# EAGLE board fen (EAGLE 8.3.2)
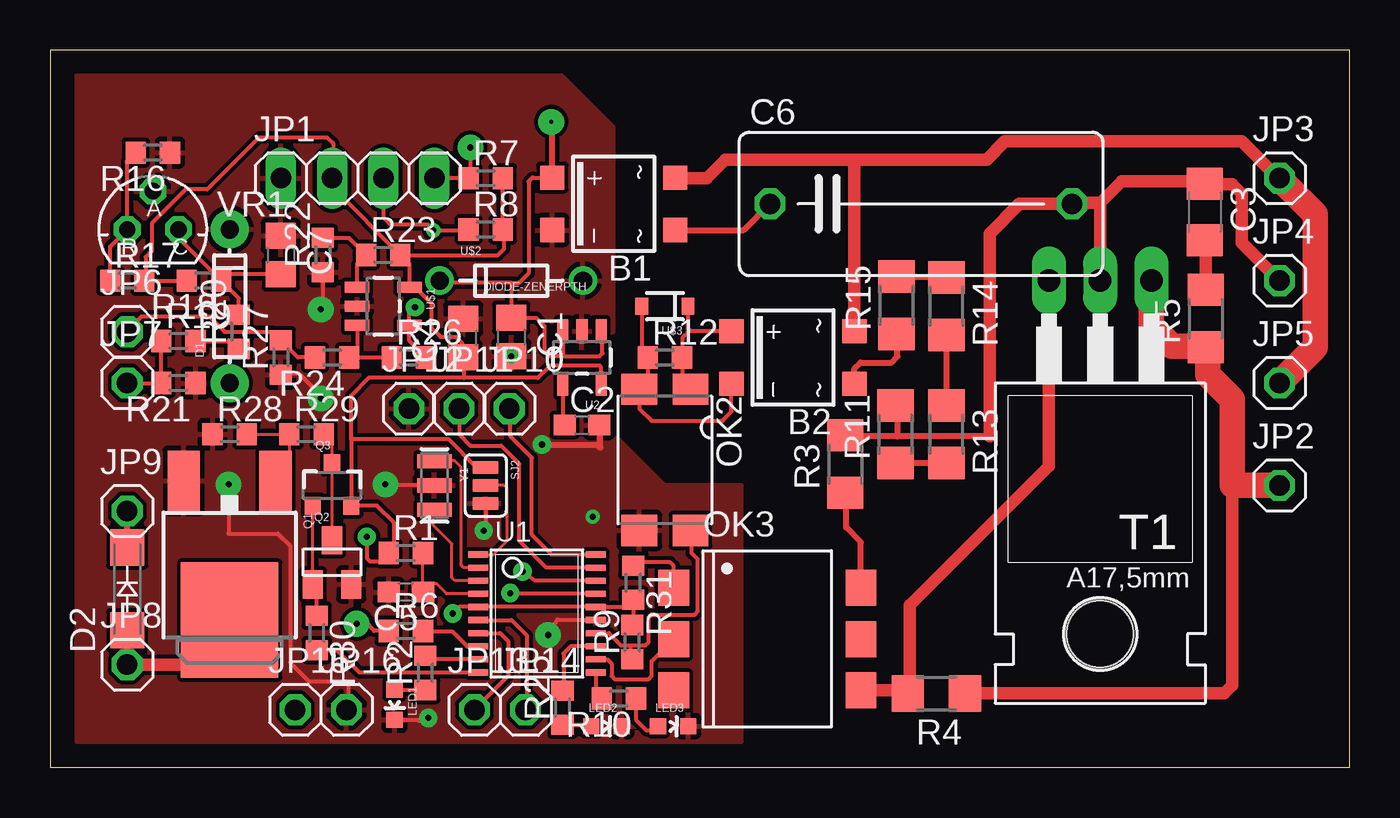
[diagram p0: board, top side]
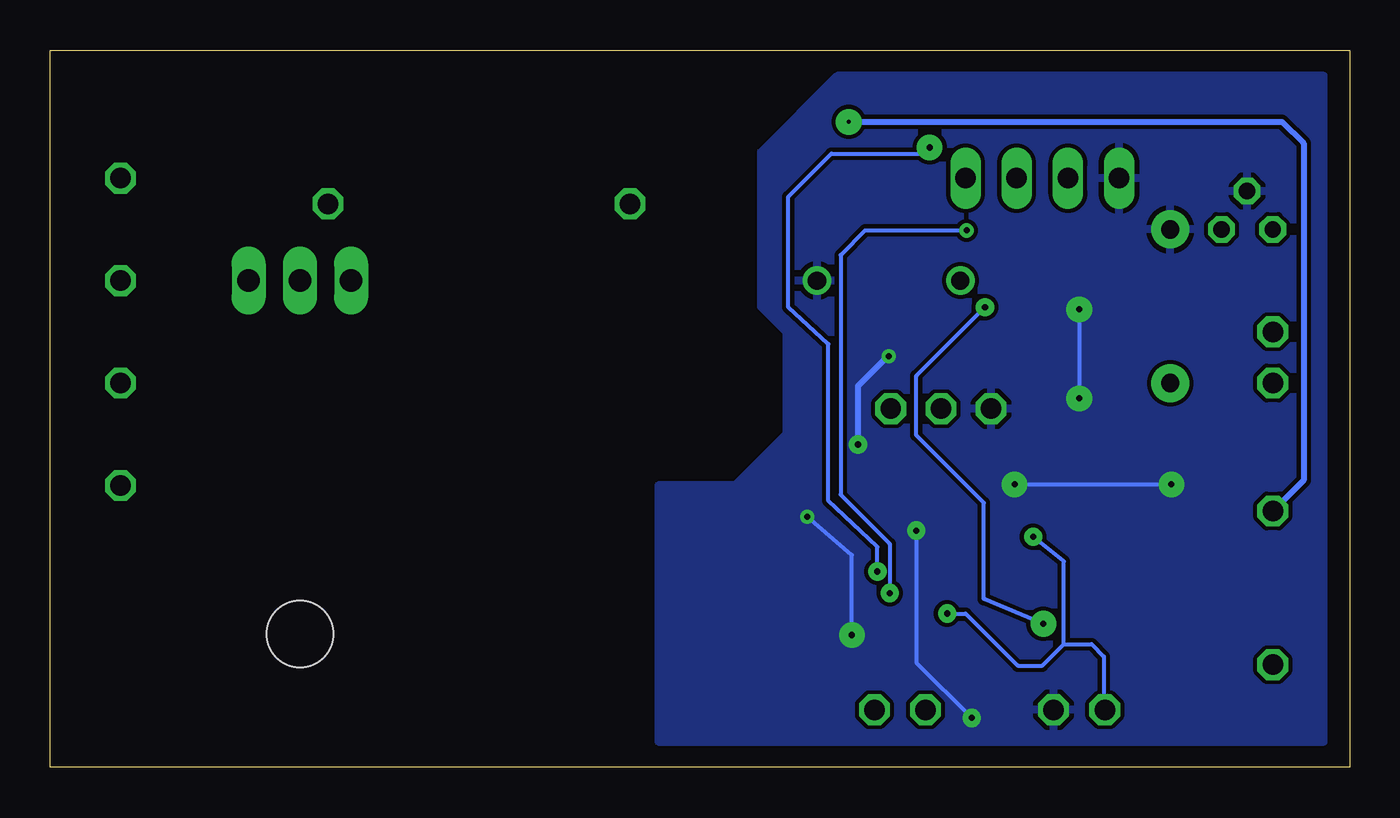
[diagram p1: board, bottom side, seen from below]

Size 64.44 x 35.55 mm. Coordinates in mm from the lower left corner, seen from the top.
Outline: 0,0 64.44,0 64.44,35.55 0,35.55 0,0
Copper layers (1*16): Top 0.035mm / dielectric 1.5mm / Bottom 0.035mm
Design rules "default": minimum track width 10mil, minimum drill 24mil, track to track 8mil, track to pad 8mil, pad to pad 8mil, via to via 8mil, smd to smd 8mil, copper to edge 40mil, drill to drill 8mil, minimum pad ring 10mil, minimum via ring 8mil, stop-mask expansion 4mil, vias tented up to drill 0mil, thermal gap 10mil

## Footprints (pad centres in the part's own frame; a part is rotated, then mirrored left to right if it is on the bottom)
SOIC-4 = smd 1.2 x 1.2: + 1.3,3.05; - -1.3,3.05; ~1 -1.3,-3.05; ~2 1.3,-3.05
C0805 = smd 1.3 x 1.5: 1 -0.95,0; 2 0.95,0
C0603 = smd 1.1 x 1: 1 -0.85,0; 2 0.85,0
C1206 = smd 1.6 x 1.8: 1 -1.4,0; 2 1.4,0
C150-072X183 = drill 1.016 octagon: 1 -7.493,0; 2 7.493,0
DIODE-1N4148 = drill 0.9 pad 1.88: A -3.81,0; C 3.81,0
SMA-DO214AC = smd 1.8 x 1.7: A -2.05,0; K 2.05,0
1X04 = drill 1.016 long: 1 -3.81,0; 2 -1.27,0; 3 1.27,0; 4 3.81,0
1X01 = drill 1.016 octagon: 1 0,0
LED-0603 = smd 0.8 x 0.8: A 0,-0.75; C 0,0.75
SMD4 = smd 1.78 x 1.55: 1 -1.27,-3.5; 2 1.27,-3.5; 3 1.27,3.5; 4 -1.27,3.5
DIL6-SMD = smd 1.78 x 1.52: 1 -2.54,-4.645; 2 0,-4.645; 3 2.54,-4.645; 4 2.54,4.645; 5 0,4.645; 6 -2.54,4.645
DPAK = smd 1.6 x 3: 1 -2.28,-5.31; 3 2.28,-5.31 | smd 4.826 x 5.715: 4 0,1.588
SOT23 = smd 1 x 1.4: 1 -0.95,-1.1; 2 0.95,-1.1; 3 0,1.1
SOT23-3 = smd 0.8 x 0.9: 1 -0.95,-1; 2 0.95,-1; 3 0,1.1
R0603 = smd 1 x 1.1: 1 -0.85,0; 2 0.85,0
R1206 = smd 1.6 x 1.803: 1 -1.422,0; 2 1.422,0
SJ_3 = smd 0.635 x 1.27: 1 -0.889,0; 2 0,0; 3 0.889,0
TO220BH = drill 1.118 long: G 2.54,-6.35; T1 -2.54,-6.35; T2 0,-6.35 | hole 3.302: 0,11.176
TSSOP20 = smd 0.305 x 0.991: 1 -2.925,-2.918; 2 -2.275,-2.918; 3 -1.625,-2.918; 4 -0.975,-2.918; 5 -0.325,-2.918; 6 0.325,-2.918; 7 0.975,-2.918; 8 1.625,-2.918; 9 2.275,-2.918; 10 2.925,-2.918; 11 2.925,2.918; 12 2.275,2.918; 13 1.625,2.918; 14 0.975,2.918; 15 0.325,2.918; 16 -0.325,2.918; 17 -0.975,2.918; 18 -1.625,2.918; 19 -2.275,2.918; 20 -2.925,2.918
SOT23-5 = smd 0.55 x 1.2: 1 -0.95,-1.3; 2 0,-1.3; 3 0.95,-1.3; 4 0.95,1.3; 5 -0.95,1.3
DIODE-ZENER = drill 0.9: P$1 -3.556,0; P$2 3.556,0
SOD-323 = smd 0.63 x 0.83: 1 -1.15,0; 2 1.15,0
TO92-CLP = drill 0.813 octagon: A 0,1.905; C 1.27,0; R -1.27,0
RESONATOR-SMD = smd 0.7 x 1.7: 1 -1.2,0; 2 0,0; 3 1.2,0

## Placement (x,y rotation side)
B1  MB8S  [SOIC-4]  27.94,27.94 90 top
B2  MB8S  [SOIC-4]  36.83,20.32 90 top
C1  [C0805]  22.86,21.34 270 top
C2  [C0603]  26.37,16.97 0 top
C3  [C1206]  57.25,27.53 270 top
C4  [C0805]  20.47,21.29 90 top
C5  [C0603]  17.63,8.69 180 top
C6  [C150-072X183]  43.18,27.94 0 top
C7  [C0805]  11.43,25.4 270 top
D1  [DIODE-1N4148]  8.89,22.86 90 top
D2  GF1  [SMA-DO214AC]  3.81,8.84 90 top
JP1  [1X04]  15.24,29.21 0 top
JP2  [1X01]  60.96,13.97 0 top
JP3  [1X01]  60.96,29.21 0 top
JP4  [1X01]  60.96,24.13 0 top
JP5  [1X01]  60.96,19.05 0 top
JP6  [1X01]  3.81,21.59 0 top
JP7  [1X01]  3.81,19.05 0 top
JP8  [1X01]  3.81,5.08 0 top
JP9  [1X01]  3.81,12.7 0 top
JP10  [1X01]  22.76,17.78 0 top
JP11  [1X01]  20.27,17.78 0 top
JP12  [1X01]  17.78,17.78 0 top
JP13  [1X01]  21.03,2.84 0 top
JP14  [1X01]  23.57,2.84 0 top
JP15  [1X01]  12.14,2.84 0 top
JP16  [1X01]  14.68,2.84 0 top
LED1  [LED-0603]  17.07,3.1 180 top
LED2  [LED-0603]  27.58,2.03 270 top
LED3  [LED-0603]  30.89,2.03 270 top
OK2  LTV816S  [SMD4]  30.48,15.24 180 top
OK3  MOC3042S  [DIL6-SMD]  35.56,6.35 270 top
Q1  MOSFET-NCHANNELFDD8780  [DPAK]  8.89,8.89 180 top
Q2  [SOT23]  13.97,10.16 0 top
Q3  TRANSISTOR_PNPSMD  [SOT23-3]  13.97,13.97 0 top
R1  [R0603]  17.63,10.62 0 top
R2  [R0603]  18.59,4.67 90 top
R3  [R1206]  39.42,15.04 90 top
R4  [R1206]  43.94,3.66 180 top
R5  [R1206]  57.3,22.25 90 top
R6  [R0603]  17.63,6.76 0 top
R7  [R0603]  21.59,29.21 0 top
R8  [R0603]  21.59,26.67 0 top
R9  [R0603]  28.85,6.2 90 top
R10  [R0603]  28.19,3.4 180 top
R11  [R1206]  41.91,16.51 90 top
R12  [R0603]  30.48,20.32 0 top
R13  [R1206]  44.45,16.51 270 top
R14  [R1206]  44.45,22.86 270 top
R15  [R1206]  41.96,22.91 90 top
R16  [R0603]  5.08,30.48 180 top
R17  [R0603]  3.81,24.13 0 top
R18  [R0603]  7.62,24.13 180 top
R19  [R0603]  6.35,21.13 0 top
R20  [R0603]  9.35,21.59 90 top
R21  [R0603]  6.35,19.05 180 top
R22  [R0603]  13.51,25.4 90 top
R23  [R0603]  16.51,25.4 0 top
R24  [R0603]  13.97,20.32 180 top
R25  [R0603]  25.4,2.95 90 top
R26  [R0603]  17.78,20.32 0 top
R27  [R0603]  11.43,20.32 90 top
R28  [R0603]  8.89,16.51 0 top
R29  [R0603]  12.7,16.51 0 top
R30  [R0603]  13.21,6.65 270 top
R31  [R0603]  28.91,9.14 270 top
SJ2  [SJ_3]  21.59,13.97 270 top
T1  BT138-H  [TO220BH]  52.07,17.78 180 top
U1  STM32F042FX  [TSSOP20]  24.13,7.62 270 top
U2  [SOT23-5]  26.37,20.32 180 top
U$1  LMV321M5  [SOT23-5]  16.51,22.86 270 top
U$2  DIODE-ZENERPTH  [DIODE-ZENER]  22.86,24.13 0 top
U$3  DIODE-ZENER-BZT52  [SOD-323]  30.48,22.86 180 top
VR1  [TO92-CLP]  5.08,26.67 0 top
Y1  8MHZ  [RESONATOR-SMD]  19.05,13.97 270 top

## Library data of the parts
B1 B2 = rectifier
C1-C7 R1-R31 = rcl
D1 Q2 Q3 U$2 U$3 = SparkFun-DiscreteSemi
D2 = diode
JP1-JP16 = pinhead
LED1-LED3 = SparkFun-LED
OK2 = optocoupler; OC_FARNELL: unknown; OC_NEWARK: unknown
OK3 = optocoupler; MF: FAIRCHILD SEMICONDUCTOR; MPN: MOC3042SM; OC_FARNELL: unknown; OC_NEWARK: 34C1339
Q1 = SparkFun-DiscreteSemi; PROD_ID: TRANS-09984
SJ2 = SparkFun-Passives
T1 = triac
U1 = STM32F042Fx
U2 = SparkFun-PowerIC; PROD_ID: VREG-00822
U$1 = SparkFun-AnalogIC
VR1 = v-reg
Y1 = SparkFun-FreqCtrl; PROD_ID: XTAL-08895

## Nets
ADC0: JP14.1 U1.6
ADC1: JP13.1 U1.7
ADC2: R6.2 U1.8
BOOT0: SJ2.2 U1.1
FAN-PWM: R30.2 U1.10
GND: B1.- C1.2 C2.2 C4.2 C5.2 C7.1 D1.C JP1.1 JP12.1 JP16.1 LED1.C LED2.C LED3.C OK2.3 Q1.3 Q2.2 R16.1 R21.1 R22.1 R27.1 R28.1 SJ2.3 U1.15 U2.2 U$1.2 U$2.P$2 VR1.A Y1.2
HEAT-PWM: OK3.2 U1.12
L: C3.1 C6.2 JP4.1 R3.2 R11.2 T1.T2
LED-M: R10.2 U1.11
LED-P: R2.2 U1.9
LED-RUN: R25.2 U1.13
N: B1.~2 B2.~2 JP3.1 JP5.1
N$1: LED2.A R25.1
N$2: OK3.4 R4.2 T1.G
N$3: OK3.6 R3.1
N$4: C3.2 R5.2
N$5: JP2.1 R4.1 R5.1 T1.T1
N$6: R6.1 R26.2 U$1.4
N$7: C2.1 U2.4
N$8: B2.- OK2.2 R12.1 U$3.2
N$10: B1.~1 C6.1
N$11: R11.1 R13.2
N$12: R14.1 R15.2
N$13: R13.1 R14.2
N$14: OK3.1 R31.1
N$15: B2.+ OK2.1 R12.2 U$3.1
N$16: R16.2 R17.1 VR1.R
N$17: D2.A JP8.1 Q1.4
N$18: C7.2 R18.1 R20.2 VR1.C
N$19: R22.2 R23.1 U$1.1
N$20: R24.1 R26.1 U$1.3
N$21: JP6.1 R24.2 R27.2
N$22: JP7.1 R19.1 R21.2
N$23: D1.A R19.2 R20.1
N$24: Q1.1 R28.2 R29.1
N$25: Q2.3 Q3.3 R29.2
N$26: Q2.1 Q3.1 R30.1
N$27: B2.~1 R15.1
N$28: LED3.A R10.1
N$29: LED1.A R2.1
NRST: C5.1 R1.2 U1.4
OSC-IN: U1.2 Y1.1
OSC-OUT: U1.3 Y1.3
SCL: JP1.3 R8.1 U1.17
SDA: JP1.4 R7.1 U1.18
SWCLK: JP10.1 U1.20
SWIO: JP11.1 U1.19
VCC: C4.1 JP1.2 JP15.1 Q3.2 R1.1 R7.2 R8.2 R9.2 R17.2 R18.2 R23.2 R31.2 SJ2.1 U1.5 U1.16 U2.5 U$1.5
VCC-IN: B1.+ C1.1 D2.K JP9.1 U2.1 U2.3 U$2.P$1
ZERO-DETECT: OK2.4 R9.1 U1.14

## Tracks (layer width: path | path; a pad name or v marks a point on that pad's centre or on a via)
ADC0
  Top 0.203: U1.6 22.88,7.29 23.62,6.55 23.62,2.9 JP14.1
ADC1
  Top 0.203: U1.7 22.31,6.64 22.71,6.25 22.71,4.52 JP13.1
ADC2
  Top 0.203: U1.8 20.68,6 19.96,6.71 18.53,6.71 R6.2
BOOT0
  Top 0.152: U1.1 21.98,10.54 22.66,11.23 22.66,13.82 22.5,13.97 SJ2.2
FAN-PWM
  Top 0.203: U1.10 15.32,4.7 14.21,5.8 R30.2
GND  (via drill 0.3, 0.3 pad 0.9, 0.3 pad 1.27)
  Top 0.203: U1.15 25.17,7.29 25.15,7.32 v24.69,6.55 | SJ2.3 21.59,11.84 v21.49,11.73 | v18.75,2.44 18.44,2.44 18.29,2.29 18.23,2.35 LED1.C | Y1.2 16.66,13.97 v16.61,14.02 | v8.84,14.02 8.84,11.58 11.28,11.58 11.89,10.97 11.89,5.18 12.8,4.27 14.63,4.27 14.78,4.12 14.78,2.95 JP16.1 | R22.1 13.51,22.81 v13.41,22.71 | v13.41,18.29 13.41,18.44 12.34,19.51 11.47,19.51 R27.1
  Top 0.305: 22.86,19.81 C1.2 | v24.38,16 27.13,16 27.28,15.85 27.28,16.9 C2.2
  Bottom 0.203: v24.69,6.55 24.69,10.52 v26.9,12.42 26.98,12.5 | v21.49,11.73 21.49,5.18 v18.75,2.44 | v16.61,14.02 v8.84,14.02 | v13.41,22.71 v13.41,18.29
  Bottom 0.305: C1.2 22.9,20.39 24.38,18.9 v24.38,16
  other vias: 22.86,20.39
  pour Top: 1.27,1.27 34.29,1.27 34.29,13.97 30.48,13.97 26.67,17.78 26.67,20.32 27.94,21.59 27.94,31.75 25.4,34.29 1.27,34.29
  pour Bottom: 1.27,34.29 25.4,34.29 29.21,30.48 29.21,22.86 27.94,21.59 27.94,16.51 30.48,13.97 34.29,13.97 34.29,1.27 1.27,1.27
HEAT-PWM
  Top 0.203: U1.12 27.62,5.34 27.84,5.13 27.84,4.52 27.99,4.37 29.67,4.37 29.82,4.52 29.82,5.25 OK3.2
L
  Top 0.305: R11.2 42.01,17.83 42.01,16.41 | 46.58,16.41 42.01,16.41 | R3.2 39.47,16.41 42.01,16.41
  Top 0.61: 46.58,16.41 46.58,26.47 48.06,27.94 C6.2 50.72,27.99 52.07,27.99 | T1.T2 52.07,27.99 | JP4.1 59.08,26.01 59.08,28.45 58.62,28.91 57.28,28.91 C3.1 57.13,29.06 53.14,29.06 52.07,27.99
LED-M
  Top 0.203: U1.11 27.05,3.55 R10.2
LED-P
  Top 0.203: U1.9 18.77,5.34 R2.2
LED-RUN
  Top 0.203: U1.13 25.81,6 25.45,5.64 25.45,3.85 R25.2
N
  Top 0.305: B2.~2
  Top 0.61: JP3.1 60.91,29.21 59.08,31.04 47.35,31.04 46.43,30.12 40.03,30.12 | 40.03,30.12 33.48,30.12 32.56,29.21 31.02,29.21 B1.~2 | B2.~2 39.88,29.97 40.03,30.12
  Top 1.27: JP5.1 62.74,20.83 62.74,27.43 JP3.1
N$1
  Top 0.203: R25.1 26.62,2.1 LED2.A
N$2
  Top 0.61: T1.G 49.53,14.94 42.62,8.03 42.62,3.76 R4.2 42.37,3.81 OK3.4
N$3
  Top 0.305: 40.15,8.94 OK3.6 40.2,11.15 39.47,11.89 39.47,13.56 R3.1
N$4
  Top 0.61: R5.2 57.3,26.08 C3.2
N$5
  Top 0.61: R4.1 58.22,3.66 58.62,4.06 58.62,13.97 | R5.1 57.4,20.73
  Top 1.27: 57.4,20.73 57.4,19.46 58.62,18.24 58.62,13.97 JP2.1 | 57.25,20.88 R5.1 57.25,20.88 | T1.T1 54.61,21.89 55.63,20.88 57.25,20.88
N$6  (via drill 0.3 pad 0.9, 0.3 pad 1.27)
  Top 0.203: R26.2 17.81,21.14 U$1.4 17.81,22.54 v18.09,22.81 | R6.1 16.05,6.76 15.7,7.16 v15.19,7.11
  Bottom 0.203: v15.19,7.11 18.09,8.33 18.14,8.33 18.14,13.11 21.49,16.46 21.49,19.41 v18.09,22.81
N$7
  Top 0.203: U2.4 25.41,17.07 C2.1
N$8
  Top 0.203: U$3.2 29.33,20.62 R12.1 29.63,19.16 OK2.2 29.21,17.78 29.82,17.17 33.33,17.17 33.78,17.63 B2.-
N$10
  Top 0.305: B1.~1 34.39,26.64 C6.1
N$11
  Top 0.305: R11.1 R13.2
N$12
  Top 0.305: R15.2 44.4,24.33 R14.1
N$13
  Top 0.305: R13.1 R14.2
N$14
  Top 0.203: OK3.1 30.91,9.98 30.73,10.16 29.07,10.16 R31.1
N$15
  Top 0.203: 31.63,21.74 U$3.1 | 31.63,21.74 31.63,21.57 31.34,21.29 31.34,20.33 R12.2 31.33,19.16 OK2.1 | B2.+ 31.75,21.62 31.63,21.74
N$16
  Top 0.203: R16.2 3.81,30.06 VR1.R 2.96,25.82 R17.1
N$17
  Top 0.305: JP8.1 D2.A
  Top 0.61: JP8.1 6.67,5.08 Q1.4
N$18
  Top 0.203: C7.2 8.79,24.45 R18.1 | VR1.C 6.35,26.25 R18.1 | R20.2 9.35,23.25 R18.1
N$19
  Top 0.203: U$1.1 15.21,24.95 R23.1 14.81,26.25 R22.2
N$20
  Top 0.203: R26.1 R24.1 15.21,20.71 U$1.3
N$21
  Top 0.203: JP6.1 3.81,21.64 4.52,22.35 7.87,22.35 8.64,21.59 11.01,21.59 R27.2 12.28,20.32 R24.2
N$22
  Top 0.203: JP7.1 R21.2 R19.1
N$23
  Top 0.203: R19.2 8.95,21.13 R20.1 8.89,20.28 D1.A
N$24
  Top 0.152: R28.2 R29.1 11.85,14.88 Q1.1
N$25
  Top 0.152: Q2.3 Q3.3 13.97,16.09 R29.2
N$26
  Top 0.152: Q2.1 Q3.1
  Top 0.203: R30.1 13.21,8.87 Q2.1
N$27
  Top 0.305: B2.~1 39.88,19.76 40.18,20.07 41.71,20.07 42.01,20.37 42.01,21.44 R15.1
N$28
  Top 0.203: R10.1 29.04,2.35 29.57,1.83 30.24,1.83 LED3.A
N$29
  Top 0.203: R2.1 17.09,3.82 LED1.A
NRST
  Top 0.152: 18.48,9.09 R1.2 | 18.48,9.09 C5.1 | U1.4 19.65,8.6 19.15,9.09 18.48,9.09
OSC-IN
  Top 0.152: U1.2 20.48,9.89 20.37,10.01 20.37,14.88 20.07,15.19 19.07,15.19 Y1.1
OSC-OUT
  Top 0.152: U1.3 20.07,9.24 19.91,9.4 19.91,11.07 19,11.99 19,12.72 Y1.3
SCL  (via drill 0.3, 0.3 pad 0.9)
  Top 0.203: JP1.3 16.51,27.28 16.87,26.92 18.69,26.92 v19,26.62 20.69,26.62 R8.1 | U1.17 22.85,8.6 v22.81,8.64
  Bottom 0.203: v19,26.62 24.03,26.62 25.25,25.4 25.25,13.51 22.81,11.07 v22.81,8.64
SDA  (via drill 0.3 pad 0.9, 0.3 pad 1.27)
  Top 0.203: JP1.4 R7.1 20.83,29.3 v20.83,30.73 | U1.18 24.03,9.24 v23.42,9.7
  Bottom 0.203: v23.42,9.7 23.42,10.92 25.86,13.21 25.86,20.98 27.84,22.81 27.84,28.3 25.7,30.43 21.13,30.43 v20.83,30.73
SWCLK
  Top 0.203: U1.20 24.86,10.54 23.88,11.53 23.88,15.34 22.81,16.41 22.81,17.73 JP10.1
SWIO
  Top 0.203: JP11.1 20.27,16.51 20.83,15.95 22.35,15.95 23.27,15.04 23.27,11.23 24.6,9.89 U1.19
VCC  (via drill 0.3 pad 0.9)
  Top 0.203: R9.2 28.91,7.1 R31.2 28.56,7.95 U1.16 U1.5 20.29,7.95 v19.96,7.62 | SJ2.1 21.16,14.86 19.76,16.26 14.92,16.26 | U2.5 27.32,19.83 27.23,19.91 24.79,19.91 24.18,19.3 20.52,19.3 | 20.52,19.3 20.52,20.28 C4.1 20.42,20.39 20.42,21.03 20.12,21.34 19.36,21.34 18.9,21.79 18.9,23.01 18.1,23.81 U$1.5 17.81,24.95 R23.2 | R23.2 22.2,25.4 22.5,25.7 22.5,26.61 R8.2 R7.2 | R23.2 13.97,28.79 JP1.2 14.02,29.26 14.02,30.94 13.72,31.24 10.36,31.24 7.77,28.65 6.71,28.65 5.03,26.98 5.03,25.6 4.72,25.3 4.72,24.13 | 4.72,24.13 R18.2 | 4.72,24.13 R17.2 | 14.92,16.26 14.92,18.43 15.8,19.3 20.52,19.3 | 14.92,16.26 Q3.2 16.19,12.97 17.02,12.14 17.02,10.25 R1.1 16.88,10.21 15.85,10.21 15.7,10.36 v15.7,11.43
  Bottom 0.203: v19.96,7.62 19.05,7.62 16.46,5.03 15.24,5.03 14.17,6.1 | 14.17,6.1 14.17,10.21 v15.7,11.43 | 14.17,6.1 12.8,6.1 12.19,5.49 12.19,2.9 JP15.1
VCC-IN  (via drill 0.2 pad 1.27)
  Top 0.203: B1.+ 23.91,29.24 23.72,29.06 23.72,24.49 23.27,24.03 22.81,24.03 | 22.81,24.03 19.41,24.03 U$2.P$1 | 22.81,24.03 22.86,23.98 C1.1 24.09,22.29 24.49,21.89 24.49,20.68 24.79,20.37 25.4,20.37 | 25.4,20.37 27.23,20.37 27.38,20.52 27.38,21.55 U2.1 | U2.3 25.41,20.39 25.4,20.37
  Top 0.305: B1.+ 24.89,31.95 v24.84,32 | D2.K JP9.1
  Bottom 0.305: v24.84,32 3.35,32 2.29,30.94 2.29,14.22 JP9.1
ZERO-DETECT
  Top 0.203: U1.14 27.7,6.64 28.3,6.04 28.75,6.04 | 28.75,6.04 28.75,5.45 R9.1 | 28.75,6.04 29.52,6.04 29.67,6.2 29.67,7.42 29.82,7.57 31.95,7.57 32.11,7.72 32.11,10.31 31.8,10.62 31.8,11.69 OK2.4